# Altium PCB Mega2560_ESP32.PcbDoc
Units mil, origin at the board's own origin, x right, y up, seen from the top; angles counter-clockwise.
Board outline 7370.23 x 4450.03 mil, 2 copper layers (Top Layer, Bottom Layer); 57 components, 47 nets, 259 pads, 10 vias.
Unrouted connection lines stored in the file: 7.
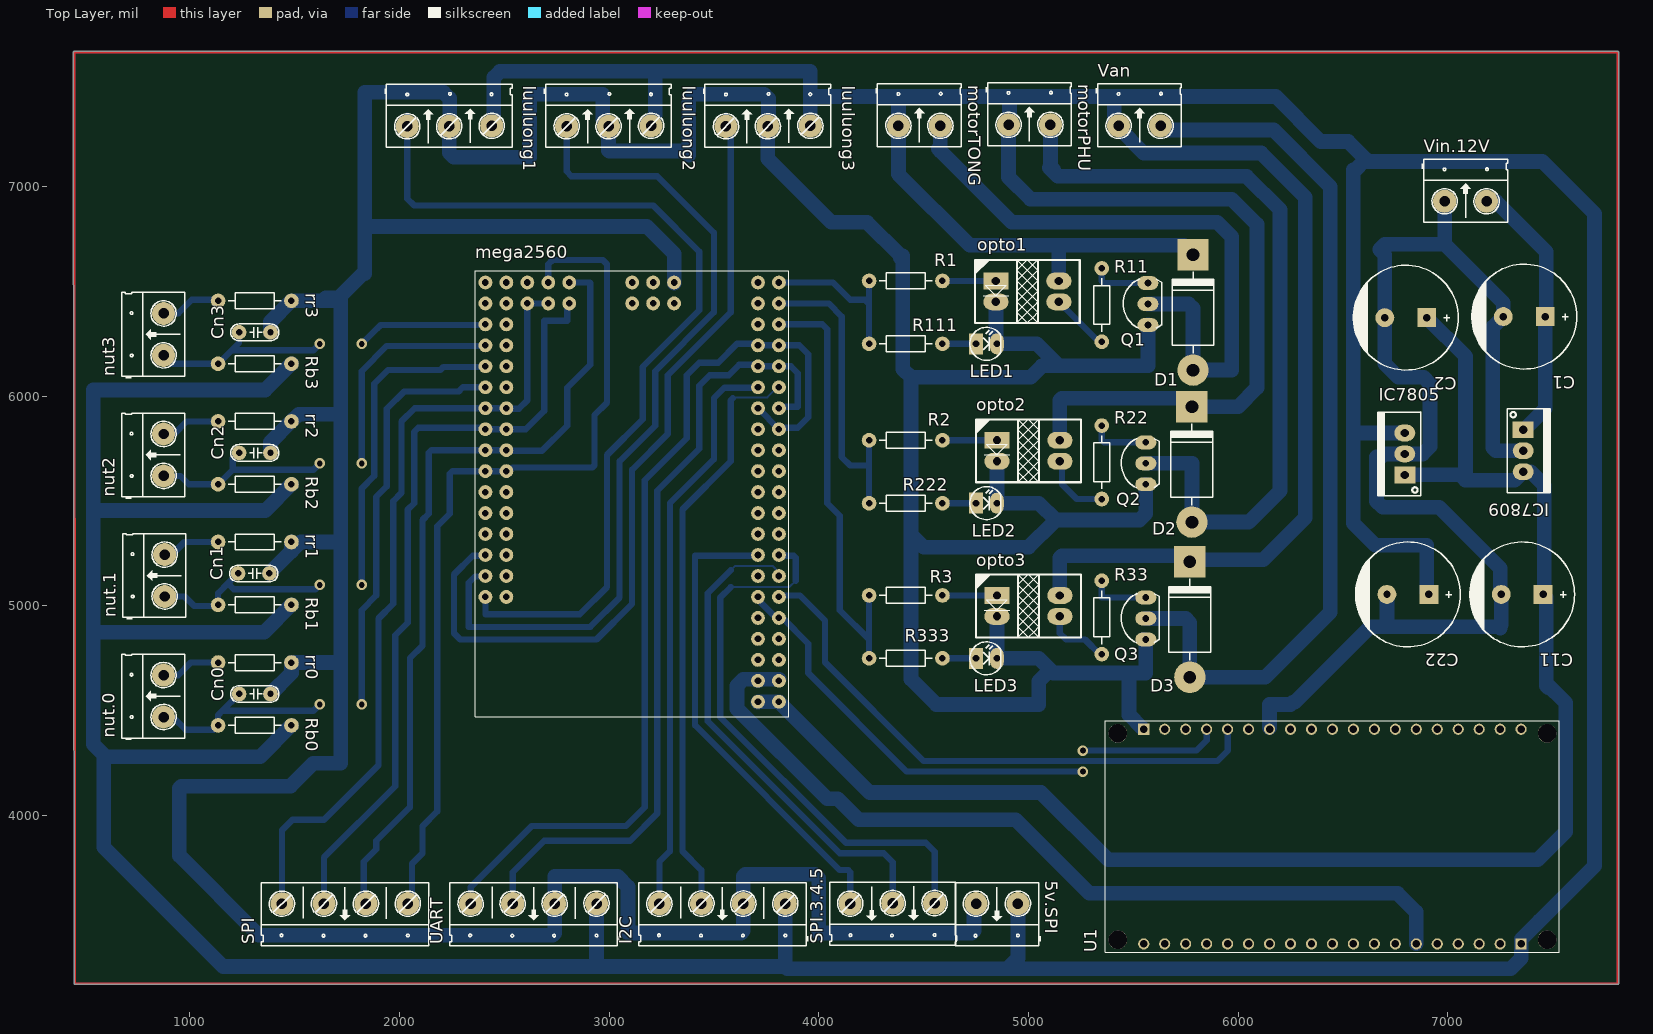
[diagram p0: Top Layer view]
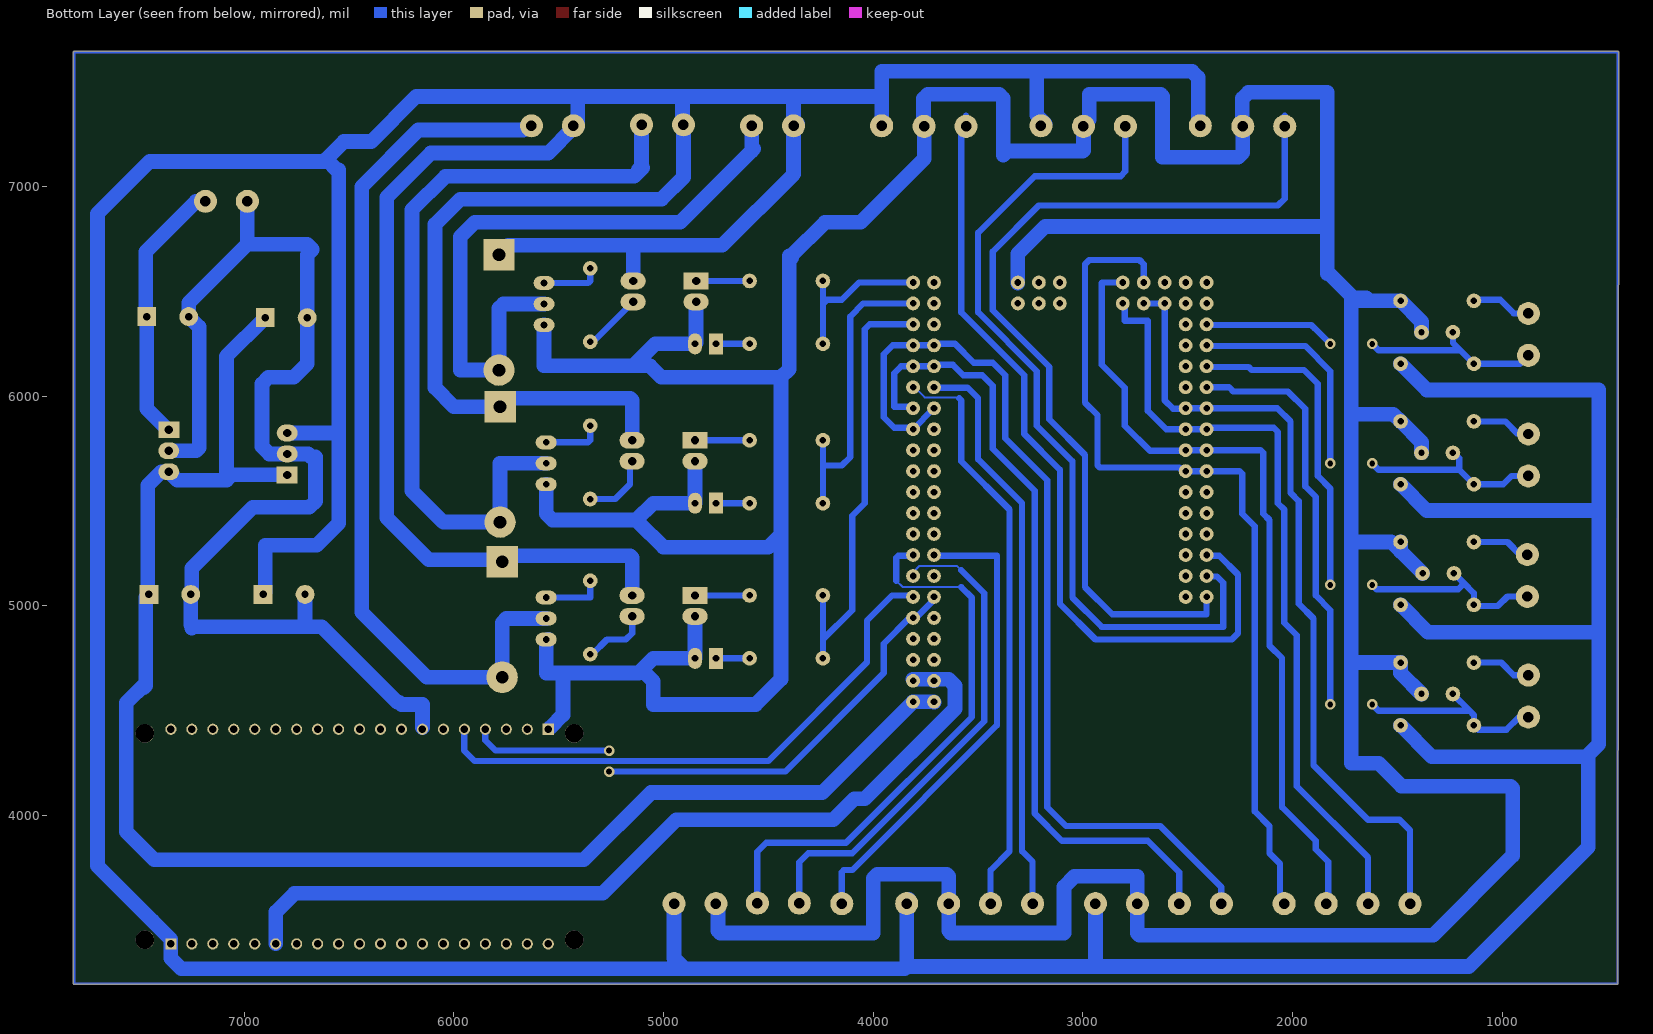
[diagram p1: Bottom Layer view, seen from below]
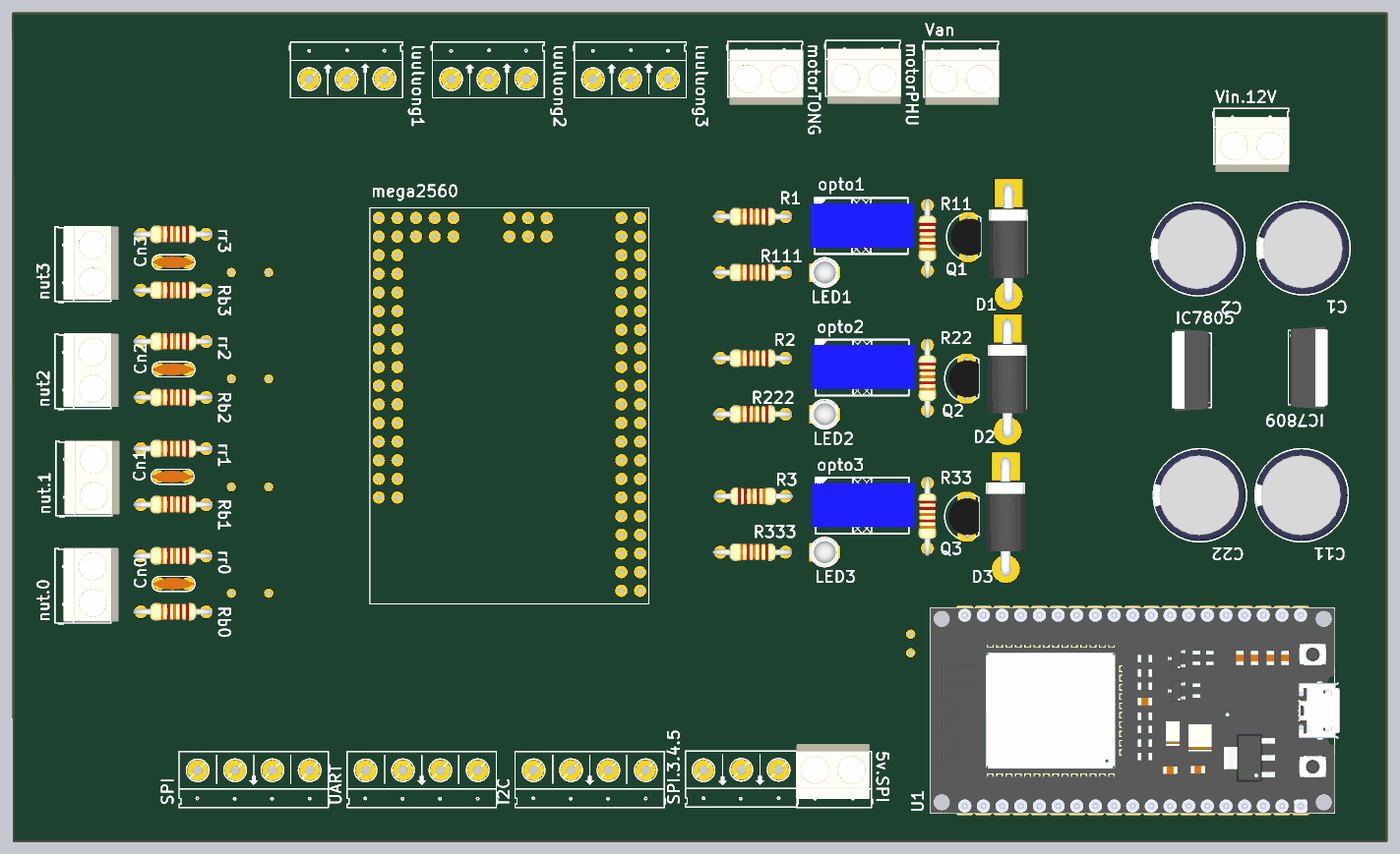
[diagram p2: 3D render of the assembled board from above, using the file's embedded part models]

## Layer stack, top to bottom
Top Solder: solder mask 0.4, Solder Resist, Dk 3.5
Top Layer: signal copper 1.4
Dielectric 1: dielectric 12.6, FR-4, Dk 4.8
Bottom Layer: signal copper 1.4
Bottom Solder: solder mask 0.4, Solder Resist, Dk 3.5

## Board outline
448,3200 444.78,7640 cw(c449.8,7640) 449.89,7645.01 cw(c450,7640) 450,7645.02 7810,7645.02 cw(c7810,7640) 7815.02,7640 7815.02,3200 cw(c7810,3200) 7810,3194.99 453.01,3194.99 cw(c453.01,3200)

## Design rules (kind name [scope] priority, off if disabled: settings)
Clearance [All] p1: gap=10 ignorepadtopadclearanceinfootprint=FALSE except(0: Arc-Hole Track-Hole SMDPad-Hole THPad-Hole Via-Hole Fill-Hole Poly-Hole Region-Hole Text-Hole)
PolygonConnect [All] p1: connectstyle=Relief reliefconductorwidth=10 reliefentries=4 polygonreliefangle="90 Angle" airgapwidth=10
RoutingLayers [All] p1: top layer_v5=FALSE bottom layer_v5=TRUE
RoutingVias [All] p1: holewidth=28 width=50 viastyle="Through Hole" minholewidth=28 minwidth=50 maxholewidth=28 maxwidth=50
SolderMaskExpansion [All] p1: expansion=4
Width [All] p1: maxlimit=70 minlimit=10 preferedwidth=30
29 further rules are at their usual default settings.

## Components (designator, comment, footprint, x,y, rotation, side; value= is the part's Value field where it differs from the comment)
5v.SPI "" HED2 4950,3580 r180 top value="Header 2"
C1 "" CP2/5 7465,6380 r180 top value=1000uF
C2 "" CP2/5 6900,6375 r180 top value=100uF
C11 "" CP2/5 7455,5055 r180 top value=1000uF
C22 "" CP2/5 6910,5055 r180 top value=100uF
Cn0 "103" CN1.5 1385,4580 r180 top value=0.01uF
Cn1 "103" CN1.5 1380,5155 r180 top value=0.01uF
Cn2 "103" CN1.5 1385,5730 r180 top value=0.01uF
Cn3 "103" CN1.5 1385,6305 r180 top value=0.01uF
D1 "" D5A 5785,6675 r270 top value=1N5408
D2 "" D5A 5780,5950 r270 top value=1N5408
D3 "" D5A 5770,5210 r270 top value=1N5408
I2C "" HED4 3840.39,3580.39 r180 top value="Header 4"
IC7805 "" QTO-220 6795,5625 r90 top value=LM7805
IC7809 "" QTO-220 7360,5840 r270 top value=LM7805
LED1 "LED" LED-3 4750,6250 r0 top value="LED 3 ly Single Colour"
LED2 "LED" LED-3 4750,5490 r0 top value="LED 3 ly Single Colour"
LED3 "LED" LED-3 4750,4750 r0 top value="LED 3 ly Single Colour"
luuluong1 "" HED3 2037.38,7287.38 r0 top value="Header 3"
luuluong2 "" HED3 2797.38,7287.38 r0 top value="Header 3"
luuluong3 "" HED3 3557.38,7287.38 r0 top value="Header 3"
mega2560 "" MODULE_MEGA_PRO_EMBED_CH340G_/_ATMEGA2560 3110,5535 r90 top
motorPHU "" HED2 4905,7295 r0 top value="Header 2"
motorTONG "" HED2 4380,7290 r0 top value="Header 2"
nut2 "" HED2 875,5620 r90 top value="Header 2"
nut3 "" HED2 875,6195 r90 top value="Header 2"
nut.0 "" HED2 875,4470 r90 top value="Header 2"
nut.1 "" HED2 880,5045 r90 top value="Header 2"
opto1 "" OPTO_U 4845,6550 r90 top value=TLP5211
opto2 "" OPTO_U 4850,5790 r90 top value=TLP5211
opto3 "" OPTO_U 4850,5050 r90 top value=TLP5211
Q1 "C1815" QTO-92 5570,6440 r90 top
Q2 "C1815" QTO-92 5560,5680 r90 top
Q3 "C1815" QTO-92 5560,4940 r90 top
R1 "220" R1/4W 4240,6550 r0 top value="R1/4W - 1K"
R2 "220" R1/4W 4240,5790 r0 top value="R1/4W - 1K"
R3 "220" R1/4W 4590,5050 r180 top value="R1/4W - 1K"
R11 "1k" R1/4W 5350,6260 r90 top value="R1/4W - 1K"
R22 "1k" R1/4W 5350,5510 r90 top value="R1/4W - 1K"
R33 "1k" R1/4W 5350,4770 r90 top value="R1/4W - 1K"
R111 "220" R1/4W 4240,6250 r0 top value="R1/4W - 1K"
R222 "220" R1/4W 4240,5490 r0 top value="R1/4W - 1K"
R333 "220" R1/4W 4240,4750 r0 top value="R1/4W - 1K"
Rb0 "10k" R1/4W 1135,4430 r0 top value="R1/4W - 1K"
Rb1 "10k" R1/4W 1135,5005 r0 top value="R1/4W - 1K"
Rb2 "10k" R1/4W 1135,5580 r0 top value="R1/4W - 1K"
Rb3 "10k" R1/4W 1135,6155 r0 top value="R1/4W - 1K"
rr0 "470" R1/4W 1135,4730 r0 top value="R1/4W - 1K"
rr1 "470" R1/4W 1135,5305 r0 top value="R1/4W - 1K"
rr2 "470" R1/4W 1135,5880 r0 top value="R1/4W - 1K"
rr3 "470" R1/4W 1135,6455 r0 top value="R1/4W - 1K"
SPI "" HED4 2040,3580 r180 top value="Header 4"
SPI.3.4.5 "" HED3 4552.62,3582.62 r180 top value="Header 3"
U1 "ESP32_NODEMCU" MODULE_ESP32_NODEMCU 6450,3900 r90 top
UART "" HED4 2940,3580 r180 top value="Header 4"
Van "" HED2 5430,7290 r0 top value="Header 2"
Vin.12V "" HED2 6985,6930 r0 top value="Header 2"

## Footprints (in the part's own frame and the unit in brackets; to place one, negate y for a bottom-side part, rotate by r counter-clockwise, add the part's x,y. Pads: shape width x height; smd on the part's side, far side on the other; paste and mask are expansions set on the pad)
CN1.5 [mil]
  round 70 hole 31: 1(0,0) 2(150,0)
  silkscreen extent -40,-40 190,40, body extent -40,-33 190,33, height 235
CP2/5 [mil] "Tu hoa 1000uF/25V,50V"
  rect 90x90 hole 35: 1(0,0)
  round 90 hole 35: 2(200,0)
  silkscreen extent -150,-250 350,250, body extent -142,-246 350,246, height 984
D5A [mil] "Diode 5A, W 200mil, L 550mil"
  round 150 hole 60: 1(550,0)
  rect 150x150 hole 60: 2(0,0)
  silkscreen extent 80,-100 470,100, body extent -52,-106 590,103, height 254
HED2 [mil] "Header 2, 2 pin, hight 300mil, Pin to Pin 200, Colour Green"
  round 110 hole 50: 1(0,0) 2(200,0)
  silkscreen extent -106,-100 300,200, body extent -92,-140 302,155, height 394
HED3 [mil] "Header 3, 3 pin, hight 300mil, Pin to Pin 200, Colour Green"
  round 110 hole 50: 1(0,0) 2(200,0) 3(402.62,2.62)
  silkscreen extent -106,-100 500,200
HED4 [mil] "Header 4, 4 pin, hight 300mil, Pin to Pin 200, Colour Green"
  round 110 hole 50: 1(0,0) 2(200,0) 3(400.06,0.06) 4(600.39,0.39)
  silkscreen extent -106,-100 700,200
LED-3 [mil] "LED 2 PIN, 3ly Only colour"
  rect 65x100 hole 32: 1(0,0)
  oval 65x100 hole 32: 2(100,0)
  silkscreen extent -29,-78 118,79, body extent -25,-75 113,75, height 217
MODULE_ESP32_NODEMCU [mm]
  rect 1.35x1.35 / inner round 1.35 / far side rect 1.35x1.35 hole 0.9: J4_1(13,22.86) J5_1(-13,-22.86)
  round 1.35 hole 0.9: J4_2(13,20.32) J4_3(13,17.78) J4_4(13,15.24) J4_5(13,12.7) J4_6(13,10.16) J4_7(13,7.62) J4_8(13,5.08) J4_9(13,2.54) J4_10(13,0) J4_11(13,-2.54) J4_12(13,-5.08) J4_13(13,-7.62) J4_14(13,-10.16) J4_15(13,-12.7) J4_16(13,-15.24) J4_17(13,-17.78) J4_18(13,-20.32) J4_19(13,-22.86) J5_2(-13,-20.32) J5_3(-13,-17.78) J5_4(-13,-15.24) J5_5(-13,-12.7) J5_6(-13,-10.16) J5_7(-13,-7.62) J5_8(-13,-5.08) J5_9(-13,-2.54) J5_10(-13,0) J5_11(-13,2.54) J5_12(-13,5.08) J5_13(-13,7.62) J5_14(-13,10.16) J5_15(-13,12.7) J5_16(-13,15.24) J5_17(-13,17.78) J5_18(-13,20.32) J5_19(-13,22.86)
  round 2.25 hole 2.25 unplated: ""(-12.5,26) ""(-12.5,-26) ""(12.5,26) ""(12.5,-26)
  silkscreen extent -14,-27.5 14,27.5, body extent -14.25,-28.15 14.25,27.5, height 7.05
MODULE_MEGA_PRO_EMBED_CH340G_/_ATMEGA2560 [mil]
  round 66 hole 31.5: 3V3_1(-692.13,-700) 3V3_2(-692.13,-600) 5V_1(-792.13,-700) 5V_2(-792.13,-600) 5V_3(1007.87,0) A0(-492.13,700) A1(-492.13,600) A2(-392.13,700) A3(-392.13,600) A4(-292.13,700) A5(-292.13,600) A6(-192.13,700) A7(-192.13,600) A8(-92.13,700) A9(-92.13,600) A10(7.87,700) A11(7.87,600) A12(107.87,700) A13(107.87,600) A14(207.87,700) A15(207.87,600) AREF(-592.13,-600) D2(-392.13,-600) D3(-392.13,-700) D4(-292.13,-600) D5(-292.13,-700) D6(-192.13,-600) D7(-192.13,-700) D8(-92.13,-600) D9(-92.13,-700) D10(7.87,-600) D11(7.87,-700) D12(107.87,-600) D13(107.87,-700) D14(207.87,-600) D15(207.87,-700) D16(307.87,-600) D18(307.87,-700) D18(407.87,-600) D19(407.87,-700) D20(507.87,-600) D21(507.87,-700) D22(607.87,-600) D23(607.87,-700) D24(707.87,-600) D25(707.87,-700) D26(807.87,-600) D27(807.87,-700) D28(907.87,-600) D29(907.87,-700) D30(1007.87,-600) D31(1007.87,-700) D32(307.87,700) D33(307.87,600) D34(407.87,700) D35(407.87,600) D36(507.87,700) D37(507.87,600) D38(607.87,700) D39(607.87,600) D40(707.87,700) D41(707.87,600) D42(807.87,700) D43(807.87,600) D44(907.87,700) D45(907.87,600) D46(1007.87,700) D47(1007.87,600) D48(1007.87,500) D49(907.87,500) D50(1007.87,400) D51(907.87,400) D52(1007.87,300) D53(907.87,300) GND_1(-892.13,-700) GND_2(-892.13,-600) GND_3(1007.87,-200) MISO(907.87,0) MOSI(1007.87,-100) RESET(907.87,-200) RST(-592.13,-700) RX(-492.13,-600) SCK(907.87,-100) TX(-492.13,-700) VIN_1(-992.13,-700) VIN_2(-992.13,-600)
  silkscreen extent -1063,-748 1063,748
OPTO_U [mil] "Opto hinh chu U"
  rect 80x120 hole 40: A(0,0)
  oval 80x120 hole 40: C(-100,-300) E(0,-300) K(-100,0)
  silkscreen extent -200,-400 100,100, body extent -166,-431 70,121, height 394
QTO-92 [mil] "TO-92"
  oval 66x100 hole 32: 1(-100,0) 2(0,0) 3(100,0)
  silkscreen extent -117,-65 120,118, body extent -109,-66 109,95, height 245
QTO-220 [mil] "TO-220 - 1-2-3"
  rect 80x100 hole 39: 1(0,0)
  oval 80x100 hole 39: 2(100,0) 3(200,0)
  silkscreen extent -100,-76 300,130, body extent -119,-64 322,121, height 755
R1/4W [mil] "R 1/4W, 2 Pin, 350mil"
  round 70 hole 31: 1(0,0) 2(350,0)
  silkscreen extent 48,-38 302,38, body extent -40,-47 386,47, height 111

## Part data
5v.SPI motorPHU motorTONG nut2 nut3 nut.0 nut.1 Van Vin.12V: library part Hed2, "Header 2 (Green)"
C1 C2 C11 C22: library part "Cap Pol3", "Polarized Capacitor (Surface Mount)", LatestRevisionDate=17-Jul-2002, LatestRevisionNote="Re-released for DXP Platform.", PackageReference=C0805, Publisher="Altium Limited"
Cn0 Cn1 Cn2 Cn3: library part CN1.5, "Cap np 682pF => 104pF"
D1 D2 D3: library part D5A, "Diode 5A"
I2C SPI UART: library part Hed4, "Header 4 (Green)"
IC7805 IC7809: library part LM78xx, "On ap +, from + 5 to + 24VDC", =LM7808
LED1 LED2 LED3: "LED Single colour Green and Red"
luuluong1 luuluong2 luuluong3 SPI.3.4.5: library part Hed3, "Header 3 (Green)"
mega2560: library part MEGA_PRO_EMBED_CH340G_/_ATMEGA2560, "Mega 2560 PRO (Embed) CH340G/ATmega2560-16AU", Package=None, Availability=Unavailable, MP=MEGA_PRO_EMBED_CH340G_/_ATMEGA2560, Price=None
opto1 opto2 opto3: library part OPTO_U, "Single Opto"
Q1 Q2 Q3: "NPN 600mW, ECB", =C2383
R1 R2 R3 R11 R22 R33 R111 R222 R333 Rb0 Rb1 Rb2 Rb3 rr0 rr1 rr2 rr3: library part R1/4W, "Resistor 1/4W"
U1: "NodeMCU is an open source loT platform. ESP32 is a series of low cost, low powersystem-on-chip (SoC) microcontrollers with integrated Wi-Fi & dual-mode Bluetooth.", Package=Package, Check_prices=https://www.snapeda.com/parts/ESP32%20NODEMCU/Espressif+Systems/view-part/?ref=eda, MF="Espressif Systems", MP="ESP32 NODEMCU", SnapEDA_Link=https://www.snapeda.com/parts/ESP32%20NODEMCU/Espressif+Systems/view-part/?ref=snap

## Via types
v1: diameter 50, hole 28, Top Layer to Bottom Layer, 10 vias

## Nets (pads, with @x,y where several pads share a name; then routed paths per layer and width w, separated by ;. In a path a pad name is that pad's centre, name@x,y a point inside that pad or via, vN(x,y) a via of type N, cw(c..) or ccw(c..) an arc to the next point about the centre after c; other vN are vias at no path point)
+9: C2.1 C11.1 IC7805.1 IC7809.3 mega2560.VIN_1 mega2560.VIN_2 | length 7514.5
  Bottom Layer w70: mega2560.VIN_2@3710,4540 3712.87,4542.87 mega2560.VIN_1 4242.87,4110 5060,4110 5380,3790 7430,3790 7562.91,3922.91 7562.91,4537.09 7470,4630 ; IC7805.1 7060,5625 7085,5600 ; C2.1 7085,6190 7085,5600 ; 7480,4610 7470,4620 7470,4630 ; 7085,5600 7320,5600 IC7809.3 7395,5640 7460,5575 7460,5060 C11.1 7470,5040 7470,4630
A0: luuluong1.1 mega2560.A0 | length 4388.1
  Bottom Layer w30: luuluong1.1@2037.38,7337.38 luuluong1.1 2037.38,6942.62 2070,6910 3210,6910 3430,6690 3430,6410 3160,6140 3160,5890 2990,5720 2990,5090 2860,4960 2410,4960 mega2560.A0@2410,5040
A2: luuluong2.1 mega2560.A2 | length 4025.4
  Bottom Layer w30: mega2560.A2@2390,5140 2360,5140 2330,5110 2330,4900 2910,4900 3050,5040 3050,5690 3220,5860 3220,6120 3500,6400 3500,6780 3230,7050 2820,7050 2797.38,7072.62 luuluong2.1
A4: luuluong3.1 mega2560.A4 | length 3917.9
  Bottom Layer w30: 2260,4870 2260,5150 2350,5240 mega2560.A4@2400,5240 ; 2262.58,4867.42 2290,4840 2940,4840 3109.45,5009.45 3109.45,5649.45 3280,5820 3280,6100 3580,6400 3580,7264.76 luuluong3.1 luuluong3.1@3557.38,7337.38
D3: mega2560.D3 SPI.3.4.5.2 | length 2403
  Bottom Layer w10: 3580,5170 3600.87,5190.87 3779.13,5190.87 3810,5160 mega2560.D3 mega2560.D3@3810,5140 ; mega2560.D3@3800,5130 mega2560.D3@3810,5130
  Bottom Layer w30: 3580,5170 3470,5060 3470,4450 4100,3820 4310,3820 4352.62,3777.38 SPI.3.4.5.2
D4: mega2560.D4 SPI.3.4.5.3 | length 2294.1
  Bottom Layer w30: mega2560.D4@3710,5250 3700,5240 3410,5240 3410,4430 4100,3740 4140,3740 4150,3730 SPI.3.4.5.3
D5: mega2560.D5 SPI.3.4.5.1 | length 2691.6
  Bottom Layer w10: 3580,5090 3580.87,5090.87 3859.13,5090.87 3860,5090 3890,5120
  Bottom Layer w30: 3580,5090 3530,5040 3530,4470 4130,3870 4510,3870 4552.62,3827.38 SPI.3.4.5.1 ; mega2560.D5@3810,5240 3880,5240 3890,5230 3890,5120
D16: Cn0.2 mega2560.D36 nut.0.1 Rb0.1 | length 2930.2
  Bottom Layer w30: nut.0.1 920,4470 980,4410 1115,4410 Rb0.1 1135,4480 1155,4500 ; Cn0.2 1155,4500 ; v1(1620,4530) 1590,4500 1155,4500 ; v1(1820,4530) 1820,4980 1890,5050 1890,5520 1940,5570 1940,5940 2022.87,6022.87 2282.87,6022.87 2300,6040 ; 2302.87,6042.87 mega2560.D36
D18: mega2560.D18 mega2560.D24 mega2560.D25 UART.4 | length 4464.9
  Bottom Layer w30: UART.4 2339.61,3659.61 2630,3950 3080,3950 3170,4040 3170,5600 3370,5800 3370,6100 3430,6160 3520,6160 3610,6250 mega2560.D24@3710,6250 ; mega2560.D18@3710,5940 3712.87,5940 mega2560.D18@3810,5842.87 ; mega2560.D24 3797.13,6242.87 mega2560.D25@3800,6240 ; mega2560.D25@3808.56,6241.44 mega2560.D25@3810,6240 ; mega2560.D18@3810,5850 3900,5850 3950,5900 3950,6200 3907.13,6242.87 mega2560.D25
D19: mega2560.D19 mega2560.D22 mega2560.D23 UART.3 | length 3849.3
  Bottom Layer w30: UART.3 2539.94,3729.94 2690,3880 3100,3880 3230,4010 3230,5550 3430,5750 3430,6050 3480,6100 3570,6100 3620,6150 mega2560.D22@3710,6150 ; mega2560.D22 3807.13,6142.87 mega2560.D23@3810,6140 ; mega2560.D19@3810,5940 3820,5950 3900,5950 3900,6070 ; mega2560.D23 3867.13,6142.87 3900,6110 3900,6080
D20: I2C.4 mega2560.D20 | length 2738.4
  Bottom Layer w30: I2C.4 3240,3780 3290,3830 3290,5490 3500,5700 3500,5990 3550,6040 mega2560.D20@3700,6040
D21: I2C.3 mega2560.D21 | length 2787.2
  Bottom Layer w10: 3590,5990 3594.87,5994.87 3754.87,5994.87 3800,6040 mega2560.D21@3810,6040
  Bottom Layer w30: I2C.3 3440.33,3739.67 3350,3830 3350,5460 3580,5690 3580,5980 3590,5990
D32: mega2560.D31 R1.1 R111.1 | length 786.8
  Bottom Layer w30: mega2560.D31 4067.13,6542.87 4150,6460 4220,6460 4240,6440 ; R111.1@4230,6240 R111.1 4240,6440 ; R1.1 4240,6440
D34: mega2560.D29 R2.1 R222.1 | length 1442.6
  Bottom Layer w30: mega2560.D29 4047.13,6442.87 4110,6380 4110,5710 4150,5670 4240,5670 ; R222.1 4240,5670 ; R2.1 4240,5670
D36: mega2560.D27 R3.2 R333.1 | length 2102.3
  Bottom Layer w30: mega2560.D27 4017.13,6342.87 4040,6320 4040,5490 4100,5430 4100,4980 4240,4840 ; R333.1 4240,4840 ; R3.2 4240,4840
D39: Cn3.2 mega2560.D42 nut3.1 Rb3.1 | length 1521.8
  Bottom Layer w30: nut3.1 915,6155 Rb3.1 1200,6220 ; Cn3.2 1235,6255 1200,6220 ; v1(1620,6250) 1590,6220 1200,6220 ; v1(1820,6250) 1895,6325 ; 1900,6330 1910,6340 2407.13,6340 mega2560.D42
D41: Cn2.2 mega2560.D40 nut2.1 Rb2.1 | length 1980.1
  Bottom Layer w30: nut2.1 955,5620 995,5580 Rb2.1 1205,5650 ; Cn2.2@1230,5730 1205,5705 1205,5650 ; v1(1620,5680) 1590,5650 1205,5650 ; v1(1820,5680) 1825,5680 1820,5685 1820,6120 1940,6240 mega2560.D40@2390,6240 ; mega2560.D40@2390,6242.87 mega2560.D40
D43: Cn1.2 mega2560.D38 nut.1.1 Rb1.1 | length 2478.5
  Bottom Layer w30: nut.1.1 975,5045 1020,5000 1130,5000 Rb1.1 1135,5060 1182.5,5107.5 ; Cn1.2 1182.5,5107.5 ; v1(1620,5100) 1600,5080 1210,5080 1182.5,5107.5 ; v1(1820,5100) 1825,5100 1820,5105 1820,5560 1880,5620 1880,6060 1945,6125 2195,6125 2210,6140 2407.13,6140 mega2560.D38
D50: mega2560.A12 mega2560.A13 mega2560.D50 SPI.1 | length 4178
  Bottom Layer w30: SPI.1@2040,3590 2060,3610 2060,3770 2110,3820 2110,3950 2180,4020 2180,5380 2240,5440 2240,5630 2252.87,5642.87 mega2560.A12 ; mega2560.A12@2410,5650 2417.13,5642.87 mega2560.A13 ; mega2560.A13@2530,5650 2540,5660 2920,5660 2930,5670 2930,5910 2990,5970 2990,6630 2970,6650 2730,6650 2710,6630 mega2560.D50
D51: mega2560.D34 mega2560.D35 mega2560.D49 mega2560.D51 SPI.4 | length 3831.8
  Bottom Layer w30: SPI.4@1440,3580 1440,3930 1490,3980 1640,3980 1900,4240 1900,4940 1970,5010 1970,5500 2010,5540 2010,5880 2072.87,5942.87 mega2560.D34 ; mega2560.D34@2410,5940 2412.87,5942.87 mega2560.D35 ; mega2560.D35@2510,5940 2570,5940 2610,5980 mega2560.D49@2610,6440 ; mega2560.D49 mega2560.D49@2610,6440 ; mega2560.D51 2612.87,6442.87 mega2560.D49@2610,6440
D52: mega2560.A14 mega2560.A15 mega2560.D52 SPI.2 | length 3824.3
  Bottom Layer w30: SPI.2 1830,3590 1830,3780 1890,3840 1890,3880 2050,4040 2050,4750 2110,4810 2110,5410 2140,5440 2140,5730 2152.87,5742.87 mega2560.A14 mega2560.A15 ; mega2560.A15@2510,5740 2680,5740 2800,5860 2800,6040 2910,6150 2910,6540 2907.13,6542.87 mega2560.D52
D53: mega2560.D32 mega2560.D33 mega2560.D53 SPI.3 | length 3722
  Bottom Layer w30: SPI.3 1639.94,3799.94 1980,4140 1980,4860 2040,4920 2040,5460 2070,5490 2070,5830 2090,5850 2400,5850 mega2560.D32@2410,5840 ; mega2560.D32 2497.13,5842.87 mega2560.D33@2500,5840 ; mega2560.D33 2602.87,5842.87 2690,5930 2690,6360 2800,6360 2800,6440 mega2560.D53@2810,6450
GND: 5v.SPI.2 C1.2 C2.2 C11.2 C22.2 Cn0.1 Cn1.1 Cn2.1 Cn3.1 I2C.2 IC7805.2 IC7809.2 LED1.2 LED2.2 LED3.2 luuluong1.2 luuluong2.2 luuluong3.2 mega2560.GND_1 mega2560.GND_2 mega2560.GND_3 opto1.K opto2.K opto3.K Q1.1 Q2.1 Q3.1 rr0.2 rr1.2 rr2.2 rr3.2 U1.J4_1 U1.J4_7 U1.J5_6 UART.2 Vin.12V.1 | length 35220.8
  Bottom Layer w70: Cn1.1 1485,5260 ; Cn0.1 1485,4680 rr0.2 1720,4730 ; Cn2.1 1385,5780 rr2.2 1520,5915 1720,5915 ; Cn3.1 1385,6355 rr3.2 1705,6455 1720,6470 ; rr1.2 1485,5260 ; 1640,6460 1650,6470 1720,6470 ; 1830,6590 1720,6480 1720,6470 ; 1835,6585 1835,6810 ; luuluong1.2@2230,7290 2240,7300 2240,7420 2210,7450 1835,7450 1835,6810 ; luuluong1.2 2237.38,7162.62 2260,7140 2620,7140 2620,7430 2630,7440 2970,7440 2970,7320 luuluong2.2@3000,7290 ; UART.2@2740,3610 2740,3710 3040,3710 3090,3660 3090,3440 3630,3440 3640,3450 I2C.2@3640,3580 ; UART.2@2750,3570 2740,3560 2740,3440 2730,3430 1330,3430 950,3810 950,4130 960,4140 1480,4140 1590,4250 1720,4250 1720,4730 ; luuluong2.2 2997.38,7172.62 3000,7170 3360,7170 3380,7150 3380,7420 3400,7440 3740,7440 3760,7420 3760,7310 luuluong3.2@3740,7290 ; mega2560.GND_3@3310,6540 mega2560.GND_3 3310,6680 3180,6810 1835,6810 ; I2C.2 3640.39,3710.39 3650,3720 3980,3720 4000,3700 4000,3440 4730,3440 4740,3450 5v.SPI.2@4740,3590 ; luuluong3.2 3757.38,7132.62 4060,6830 4230,6830 4390,6670 4390,6660 ; mega2560.GND_1@3810,4650 3717.13,4650 mega2560.GND_2 3702.87,4650 3640,4650 3610,4620 3610,4510 4040,4080 4090,4080 4190,3980 4940,3980 5290,3630 6760,3630 6850,3540 U1.J5_6@6850,3390 ; 4400,6670 4400,6130 4440,6090 ; opto1.K 4845,6255 LED1.2 5040,6250 5145,6145 ; opto3.K LED3.2 5050,4750 5120,4680 5480,4680 ; opto2.K LED2.2 5050,5490 5130,5410 5530,5410 5560,5440 Q2.1 ; 5100,4690 5050,4640 5050,4530 4560,4530 4440,4650 4440,5340 ; 5120,5400 5000,5280 4500,5280 4440,5340 ; U1.J4_1@5540,4420 5480,4480 5480,4680 ; Q3.1@5550,4840 5560,4830 5560,4680 5480,4680 ; Q1.1 5570,6145 5145,6145 ; U1.J4_7@6150,4420 6150,4530 6250,4530 6260,4540 6270,4540 6630,4900 6710,4900 ; C22.2 6710,4900 ; 6720,4910 6710,4900 ; Vin.12V.1 6985,6725 ; 7250,4895 7245,4900 ; C11.2@7250,5050 7250,5180 6960,5470 6690,5470 6660,5500 6660,5710 6680,5710 6695,5725 IC7805.2 6880,5725 6915,5760 6915,6060 6885,6090 6765,6090 6700,6155 C2.2 6700,6675 6675,6700 6700,6725 6985,6725 ; C11.2 7255,4910 7245,4900 ; IC7809.2 7230,5740 7215,5755 7215,6330 C1.2 7265,6445 6985,6725 ; 1485,5260 1530,5305 1720,5305 ; 1720,4730 1720,5305 ; 1720,5305 1720,5915 ; 1720,5915 1720,6470 ; 4440,5340 4440,6090 ; 4440,6090 5010,6090 5065,6145 5145,6145 ; 6710,4900 7245,4900
J4: mega2560.RST mega2560.RX U1.J4_4 | length 2644.5
  Bottom Layer w30: mega2560.RX 3710,5030 mega2560.RST@3800,4940 ; mega2560.RST 3827.13,4942.87 3950,4820 3950,4680 4420,4210 v1@5250,4210 ; v1(5260,4310) 5260,4315.67 5265.67,4310 5800,4310 5850,4360 U1.J4_4 U1.J4_4@5850,4420
  other v1: 5260,4210
J5: mega2560.TX U1.J4_5 | length 2706.9
  Bottom Layer w30: mega2560.TX@3810,5050 3910,5050 4030,4930 4030,4730 4500,4260 5900,4260 5950,4310 U1.J4_5
NetC1_1: C1.1 IC7809.1 Vin.12V.2 | length 1282.9
  Bottom Layer w70: Vin.12V.2 7230,6930 7470,6690 7470,6385 C1.1 7465,5940 7365,5840 IC7809.1
NetCn3_2: 
NetD1_1: D1.1 motorTONG.2 Q1.2 | length 3012.3
  Bottom Layer w70: 4570,7180 4580,7190 motorTONG.2 ; 4580,7170 4920,6830 5900,6830 5970,6760 5970,6125 D1.1 5785,6420 5765,6440 Q1.2
NetD2_1: D2.1 motorPHU.2 Q2.2 | length 3726.2
  Bottom Layer w70: 5100,7090 5140,7050 6040,7050 6200,6890 6200,5550 6050,5400 D2.1 5780,5680 Q2.2 ; motorPHU.2 5105,7095 5120,7080
NetD3_1: D3.1 Q3.2 Van.2 | length 4236.8
  Bottom Layer w70: Q3.2 5750,4940 5770,4920 D3.1 6130,4660 6440,4970 6440,7000 6170,7270 5670,7270 5650,7290 Van.2
NetLED1_1: LED1.1 R111.2 | length 160
  Bottom Layer w30: R111.2 LED1.1
NetLED2_1: LED2.1 R222.2 | length 164.1
  Bottom Layer w30: R222.2 4740,5490 LED2.1@4750,5480
NetLED3_1: LED3.1 R333.2 | length 160
  Bottom Layer w30: R333.2 LED3.1
Netnut2_2: nut2.2 rr2.1 | length 284.9
  Bottom Layer w30: nut2.2 925,5820 985,5880 rr2.1
Netnut3_2: nut3.2 rr3.1 | length 289
  Bottom Layer w30: nut3.2 945,6395 1010,6460 1130,6460 rr3.1
Netnut.0_2: nut.0.2 rr0.1 | length 284.9
  Bottom Layer w30: nut.0.2 945,4670 1005,4730 rr0.1
Netnut.1_2: nut.1.2 rr1.1 | length 279.9
  Bottom Layer w30: nut.1.2 915,5245 975,5305 rr1.1
Netopto1_A: opto1.A R1.2 | length 255
  Bottom Layer w30: R1.2 opto1.A
Netopto1_E: opto1.C R11.1 | length 283.7
  Bottom Layer w30: opto1.C 5335,6260 R11.1
Netopto2_A: opto2.A R2.2 | length 260
  Bottom Layer w30: R2.2 opto2.A
Netopto2_E: opto2.C R22.1 | length 323.1
  Bottom Layer w30: opto2.C 5160,5680 5160,5580 5230,5510 R22.1@5340,5510
Netopto3_A: opto3.A R3.1 | length 250
  Bottom Layer w30: R3.1 opto3.A@4840,5050
Netopto3_E: opto3.C R33.1 | length 311.4
  Bottom Layer w30: opto3.C 5150,4870 5180,4840 5270,4840 R33.1@5340,4770
NetQ1_3: Q1.3 R11.2 | length 284.1
  Bottom Layer w30: R11.2 5350,6550 5360,6540 Q1.3
NetQ2_3: Q2.3 R22.2 | length 284.1
  Bottom Layer w30: R22.2 5350,5790 5360,5780 Q2.3
NetQ3_3: Q3.3 R33.2 | length 290
  Bottom Layer w30: R33.2 5350,5040 Q3.3
VCC: 5v.SPI.1 C22.1 D1.2 D2.2 D3.2 I2C.1 IC7805.3 luuluong1.3 luuluong2.3 luuluong3.3 motorPHU.1 motorTONG.1 opto1.E opto2.E opto3.E Rb0.2 Rb1.2 Rb2.2 Rb3.2 U1.J5_1 UART.1 Van.1 | length 36568
  Bottom Layer w70: 545,5455 1360,5455 Rb2.2 ; Rb0.2 1335,4280 600,4280 ; Rb1.2 1355,4875 540,4875 ; Rb3.2 1360,6030 540,6030 540,4875 ; luuluong1.3@2450,7300 2450,7520 2480,7550 3960,7550 3960,7410 ; UART.1 2940,3280 ; luuluong2.3@3180,7300 3220,7340 3220,7530 ; I2C.1@3830,3600 I2C.1@3840,3590 ; I2C.1 3840,3580 3840,3280 ; luuluong3.3 3960,7410 ; motorTONG.1@4360,7300 4380,7280 4380,7060 4720,6720 5145,6720 ; motorTONG.1 4380,7430 ; 4905,3275 4950,3320 5v.SPI.1 5v.SPI.1@4950,3590 ; motorPHU.1 4905,7045 5010,6940 5970,6940 6090,6820 6090,6040 6000,5950 D2.2 D2.2@5770,5950 ; motorPHU.1@4910,7290 4910,7430 ; opto1.E 5145,6720 ; opto3.E 5150,5230 5160,5240 D3.2@5750,5240 ; opto2.E 5150,5980 5160,5990 5760,5990 D2.2@5770,5980 ; Van.1@5410,7290 5410,7420 5400,7430 ; Van.1@5430,7280 5550,7160 6110,7160 6320,6950 6320,5420 6120,5220 D3.2@5750,5220 ; D1.2 5740,6720 5145,6720 ; 6550,5825 6550,7080 6560,7080 6600,7120 ; IC7805.3 6565,5825 6550,5810 6550,5395 6655,5290 6900,5290 6900,5065 C22.1 ; 540,4875 540,4340 600,4280 ; 600,4280 590,4280 590,3850 1160,3280 2940,3280 ; 2940,3280 3840,3280 ; 3840,3280 3850,3270 7300,3270 7350,3320 U1.J5_1 7350,3410.53 7436.64,3497.17 7437.17,3497.17 7700,3760 7700,6870 7450,7120 6600,7120 ; 3960,7410 3980,7430 4380,7430 ; 4380,7430 4910,7430 ; 4910,7430 5400,7430 ; 5400,7430 6180,7430 6395,7215 6525,7215 6610,7130 6600,7120
pads on no net: mega2560.3V3_1 mega2560.3V3_2 mega2560.5V_1 mega2560.5V_2 mega2560.5V_3 mega2560.A1 mega2560.A3 mega2560.A5 mega2560.A6 mega2560.A7 mega2560.A8 mega2560.A9 mega2560.A10 mega2560.A11 mega2560.AREF mega2560.D2 mega2560.D6 mega2560.D7 mega2560.D8 mega2560.D9 mega2560.D10 mega2560.D11 mega2560.D12 mega2560.D13 mega2560.D14 mega2560.D15 mega2560.D16 mega2560.D26 mega2560.D28 mega2560.D30 mega2560.D37 mega2560.D39 mega2560.D41 mega2560.D43 mega2560.D44 mega2560.D45 mega2560.D46 mega2560.D47 mega2560.D48 mega2560.MISO mega2560.MOSI mega2560.RESET mega2560.SCK U1. U1.J4_2 U1.J4_3 U1.J4_6 U1.J4_8 U1.J4_9 U1.J4_10 U1.J4_11 U1.J4_12 U1.J4_13 U1.J4_14 U1.J4_15 U1.J4_16 U1.J4_17 U1.J4_18 U1.J4_19 U1.J5_2 U1.J5_3 U1.J5_4 U1.J5_5 U1.J5_7 U1.J5_8 U1.J5_9 U1.J5_10 U1.J5_11 U1.J5_12 U1.J5_13 U1.J5_14 U1.J5_15 U1.J5_16 U1.J5_17 U1.J5_18 U1.J5_19
copper on no net: | length 47197
  Top Layer w10: 449.8,7640 453.01,3200 7135,3200 7810,3200 7810,7640 450,7640
  Bottom Layer w10: 450,3200 7810,3200 7810,7640 450,7640 450,3200